# Altium PCB PCB1.PcbDoc
Units mil, origin at the board's own origin, x right, y up, seen from the top; angles counter-clockwise.
Board outline 10755 x 3040 mil, 2 copper layers (Top Layer, Bottom Layer); 15 components, 36 nets, 97 pads, 4 vias.
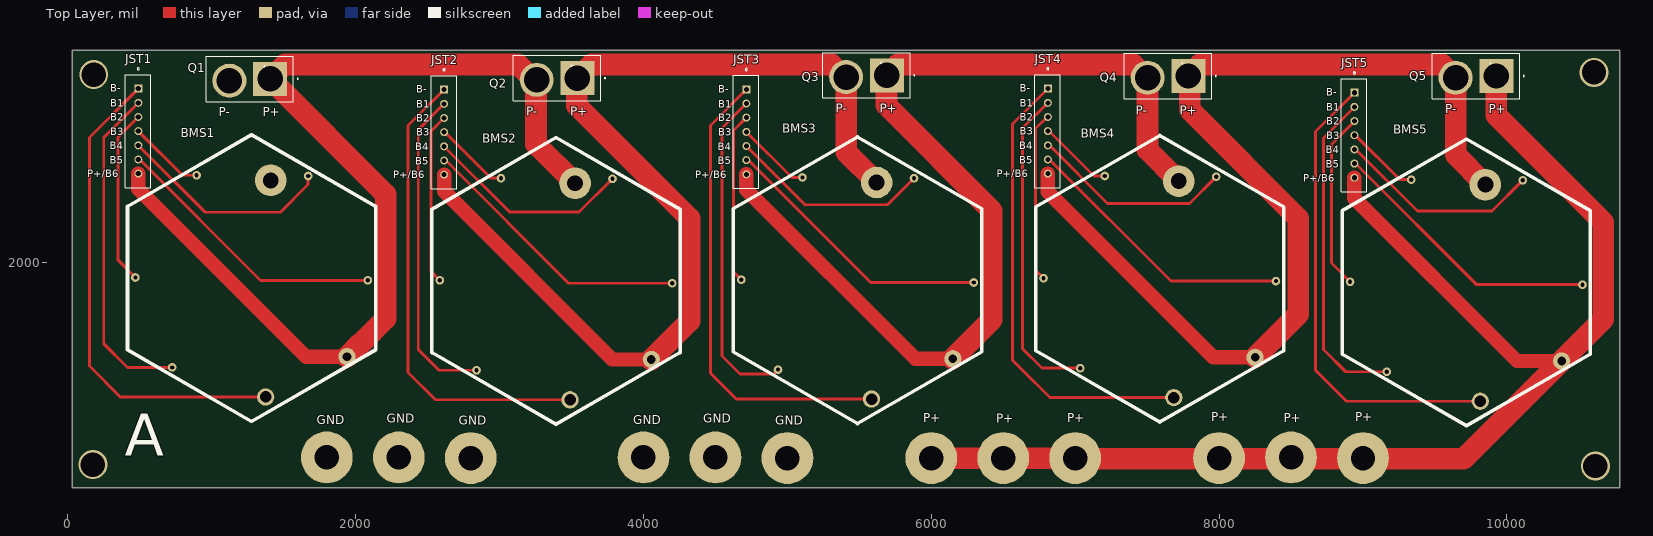
[diagram p0: Top Layer view]
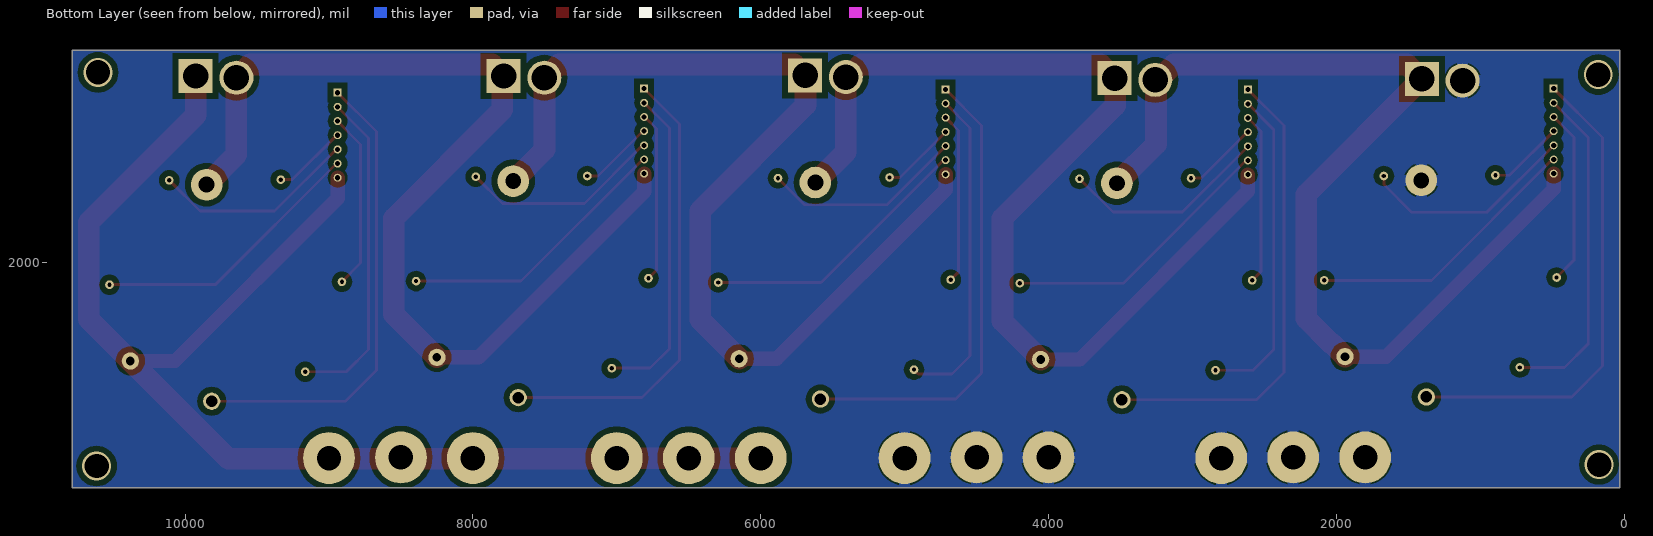
[diagram p1: Bottom Layer view, seen from below]

## Layer stack, top to bottom
Top Solder: solder mask 0.4, Solder Resist, Dk 3.5
Top Layer: signal copper 1.4
Dielectric 1: dielectric 12.6, FR-4, Dk 4.8
Bottom Layer: signal copper 1.4
Bottom Solder: solder mask 0.4, Solder Resist, Dk 3.5

## Board outline
30,435 30,3475 10785,3475 10785,435

## Design rules (kind name [scope] priority, off if disabled: settings)
Clearance Clearance_2 [InNamedPolygon('Bottom Layer-GND')] p1: gap=40 ignorepadtopadclearanceinfootprint=FALSE
Clearance [All] p2: gap=10 ignorepadtopadclearanceinfootprint=FALSE except(0: Arc-Hole Track-Hole SMDPad-Hole THPad-Hole Via-Hole Fill-Hole Poly-Hole Region-Hole Text-Hole)
PlaneClearance [All] p1: clearance=100
PolygonConnect PolygonConnect_1 [All vs IsNamedPolygon('Bottom Layer-GND')] p1: connectstyle=Relief reliefconductorwidth=80 reliefentries=4 polygonreliefangle="90 Angle" airgapwidth=10
PolygonConnect [All] p2: connectstyle=Relief reliefconductorwidth=10 reliefentries=4 polygonreliefangle="90 Angle" airgapwidth=10
RoutingVias [All] p1: holewidth=28 width=50 viastyle="Through Hole" minholewidth=28 minwidth=50 maxholewidth=28 maxwidth=50
SolderMaskExpansion [All] p1: expansion=4
Width [All] p1: maxlimit=150 minlimit=6 preferedwidth=10
29 further rules are at their usual default settings.

## Components (designator, comment, footprint, x,y, rotation, side; value= is the part's Value field where it differs from the comment)
BMS1 "BMS" BMS 2140,895 r90 top
BMS2 "BMS" BMS 4255,875 r90 top
BMS3 "BMS" BMS 6350,880 r90 top
BMS4 "BMS" BMS 8450,890 r90 top
BMS5 "BMS" BMS 10580,865 r90 top
JST1 "JST" JST 626.22,2911.57 r270 top
JST2 "JST" JST 2751.22,2904.72 r270 top
JST3 "JST" JST 4851.22,2906.85 r270 top
JST4 "JST" JST 6946.22,2911.85 r270 top
JST5 "JST" JST 9076.22,2883.43 r270 top
Q1 "XT60_YELLOW" *AMASS_XT60PB-M 1265,3275 r180 top
Q2 "XT60_YELLOW" *AMASS_XT60PB-M 3400,3280 r180 top
Q3 "XT60_YELLOW" *AMASS_XT60PB-M 5550,3300 r180 top
Q4 "XT60_YELLOW" *AMASS_XT60PB-M 7645,3295 r180 top
Q5 "XT60_YELLOW" *AMASS_XT60PB-M 9785,3295 r180 top

## Footprints (in the part's own frame and the unit in brackets; to place one, negate y for a bottom-side part, rotate by r counter-clockwise, add the part's x,y. Pads: shape width x height; smd on the part's side, far side on the other; paste and mask are expansions set on the pad)
*AMASS_XT60PB-M [mm]
  rect 6x6 hole 4.5: 1(-3.6,0)
  round 6 hole 4.5: 2(3.6,0.305)
  silkscreen extent -8.55,-4 7.7,4
BMS [mil]
  round 120 hole 80: 0(170,765)
  round 60 hole 30: 1(375,1415) 2(1000,1670) 3(1710,1245) 5(1705,470) 6(980,55)
  round 220 hole 110: 4(1675,730)
  round 120 hole 60: 7(450,200)
  silkscreen extent 0,0 1992,1725
JST [mm]
  rect 1.408x1.408 hole 0.9: 1(-7.5,-3.46)
  round 1.408 hole 0.9: 2(-5,-3.46) 3(-2.5,-3.46) 4(0,-3.46) 5(2.5,-3.46) 6(5,-3.46) 7(7.5,-3.46)
  silkscreen extent -11.2,-5.75 9.95,-1.25

## Part data
BMS1 BMS2 BMS3 BMS4 BMS5: "Battery Management System"
JST1 JST2 JST3 JST4 JST5: "Connector Header Through Hole, Right Angle 7 position 0.098 _2.50mm_", Package=None, Availability=Unavailable, MF="JST Sales", MP=S7B-XH-A_LF__SN_, Price=None, SnapEDA_Link=https://www.snapeda.com/parts/S7B-XH-A%28LF%29%28SN%29/JST%20Sales%20America%20Inc./view-part/2768211/?ref=snap
Q1 Q2 Q3 Q4 Q5: library part EC3, "Power connector; 65A; PIN: 2; Colour: yellow", Package=None, Availability=Unavailable, MF=Pololu, MP="XT60 YELLOW", Price=None, SnapEDA_Link=https://www.snapeda.com/parts/XT60%20YELLOW/Pololu/view-part/423230/?ref=snap

## Free pads (board coordinates)
  round 360 hole 170: 2(1800,645) 2(2300,645) 2(2800,640) 2(4000,645) 2(4500,645) 2(5000,640) 2(6000,640) 2(6500,640) 2(7000,640) 2(8000,640) 2(8500,645) 2(9000,640)

## Via types
v1: diameter 200, hole 170, Top Layer to Bottom Layer, 4 vias

## Nets (pads, with @x,y where several pads share a name; then routed paths per layer and width w, separated by ;. In a path a pad name is that pad's centre, name@x,y a point inside that pad or via, vN(x,y) a via of type N, cw(c..) or ccw(c..) an arc to the next point about the centre after c; other vN are vias at no path point)
GND: BMS1.4 pad.2@1800,645 pad.2@2300,645 pad.2@2800,640 pad.2@4000,645 pad.2@4500,645 pad.2@5000,640 Q1.2 | length 32.5
  Top Layer w90: Q1.2@1115.28,3225 Q1.2@1138.27,3247.99
NetBMS1_0: BMS1.0 JST1.1 | length 3381.7
  Top Layer w20: JST1.1 150,2866.85 150,1280 365,1065 BMS1.0
NetBMS1_1: BMS1.1 JST1.2 | length 2316.2
  Top Layer w20: JST1.2 250,2868.43 250,1435 415,1270 BMS1.1
NetBMS1_2: BMS1.2 JST1.3 | length 1222.6
  Top Layer w20: BMS1.2 350.11,2014.89 350.11,2870.11 JST1.3
NetBMS1_3: BMS1.3 JST1.4 | length 532
  Top Layer w20: JST1.4 796.57,2605 BMS1.3
NetBMS1_5: BMS1.5 JST1.5 | length 1512.3
  Top Layer w20: JST1.5 955.26,2347.89 1477.89,2347.89 1670,2540 BMS1.5
NetBMS1_6: BMS1.6 JST1.6 | length 1942.8
  Top Layer w20: JST1.6 500.28,2714.72 1340,1875 BMS1.6
NetBMS1_7: BMS1.7 BMS2.4 JST1.7 Q1.1 Q2.2 | length 7171.2
  Top Layer w100: JST1.7 490,2510 1655,1345 BMS1.7
  Top Layer w150: BMS1.7 2030,1435 2035,1435 2210,1610 2210,2471.73 Q1.1 1506.73,3375 3130,3375 3237.01,3267.99 Q2.2 ; Q2.2@3253.27,3255 3253.27,2821.73 BMS2.4
NetBMS2_0: BMS2.0 JST2.1 | length 3272.3
  Top Layer w20: JST2.1 2365,2950 2365,1235 2555,1045 BMS2.0
NetBMS2_1: BMS2.1 JST2.2 | length 2246.2
  Top Layer w20: JST2.2 2435,2921.57 2435,1395 2580,1250 BMS2.1
NetBMS2_2: BMS2.2 JST2.3 | length 1190.3
  Top Layer w20: BMS2.2 2525,1935 2525,2913.15 JST2.3
NetBMS2_3: BMS2.3 JST2.4 | length 527.4
  Top Layer w20: JST2.4 2620.28,2904.72 2940,2585 BMS2.3
NetBMS2_5: BMS2.5 JST2.5 | length 1455.9
  Top Layer w20: JST2.5 2615,2805 3071.04,2348.96 3552.45,2348.96 3783.5,2580 BMS2.5
NetBMS2_6: BMS2.6 JST2.6 | length 1938.3
  Top Layer w20: JST2.6 2627.13,2707.87 3480,1855 BMS2.6
NetBMS2_7: BMS2.7 BMS3.4 JST2.7 Q2.1 Q3.2 | length 7194
  Top Layer w100: JST2.7 2615,2493.19 3783.19,1325 BMS2.7
  Top Layer w150: BMS2.7 4320,1590 4320,2306.73 3536.73,3090 3536.73,3275 Q2.1 3636.73,3375 5306.58,3375 5395.32,3286.26 5410,3286.26 5410,2765 BMS3.4
NetBMS3_0: BMS3.0 JST3.1 | length 3270.2
  Top Layer w20: JST3.1 4465,2952.13 4465,1230 4645,1050 BMS3.0
NetBMS3_1: BMS3.1 JST3.2 | length 2278.3
  Top Layer w20: JST3.2 4545,2933.7 4545,1350 4670,1225 4905,1225 BMS3.1
NetBMS3_2: BMS3.2 JST3.3 | length 1187.8
  Top Layer w20: BMS3.2 4635,1925 4630.86,1925 4625,1930.86 4625,2915.28 JST3.3
NetBMS3_3: BMS3.3 JST3.4 | length 521.2
  Top Layer w20: JST3.4 5031.85,2590 BMS3.3
NetBMS3_5: BMS3.5 JST3.5 | length 1410.8
  Top Layer w20: JST3.5 5123.43,2400 5695,2400 BMS3.5
NetBMS3_6: BMS3.6 JST3.6 | length 1932.1
  Top Layer w20: JST3.6 4730,2710 5580,1860 BMS3.6
NetBMS3_7: BMS3.7 BMS4.4 JST3.7 Q3.1 Q4.2 | length 7115.4
  Top Layer w100: JST3.7 4715,2505 5890,1330 BMS3.7
  Top Layer w150: BMS3.7 6420,1600 6420,2359.4 5688.93,3090.47 5688.93,3297.2 Q3.1 5766.73,3375 7403.54,3375 7495.55,3282.99 Q4.2 7502.35,3282.08 7502.35,2782.65 BMS4.4 7717.29,2565 7712.29,2570 BMS4.4@7710,2570
NetBMS4_0: BMS4.0 JST4.1 | length 3216.3
  Top Layer w20: JST4.1 6565,2962.13 6565,1320 6635,1250 6825,1060 BMS4.0
NetBMS4_1: BMS4.1 JST4.2 | length 2237.1
  Top Layer w20: JST4.2 6635,2933.7 6635,1400 6770,1265 BMS4.1
NetBMS4_2: BMS4.2 JST4.3 | length 1180.5
  Top Layer w20: BMS4.2 6725,1945 6725,2929.14 6806.13,3010.28 JST4.3
NetBMS4_3: BMS4.3 JST4.4 | length 524.2
  Top Layer w20: JST4.4 6818.15,2911.85 7130,2600 BMS4.3
NetBMS4_5: BMS4.5 JST4.5 | length 1413.7
  Top Layer w20: JST4.5 6821.57,2813.43 7225,2410 7795,2410 BMS4.5
NetBMS4_6: BMS4.6 JST4.6 | length 1935
  Top Layer w20: JST4.6 6820,2715 7665,1870 BMS4.6
NetBMS4_7: BMS4.7 BMS5.4 JST4.7 Q4.1 Q5.2 | length 7199.6
  Top Layer w100: JST4.7 6810,2490 7960,1340 BMS4.7
  Top Layer w150: Q4.1 Q4.1@7795,3303.27 ; BMS4.7 8550,1640 8550,2305 7795,3060 Q4.1@7795,3303.27 ; BMS5.4 9643.27,2746.73 Q5.2 9551.26,3375 7866.73,3375 7854.84,3363.11 Q4.1@7795,3303.27
NetBMS5_0: BMS5.0 JST5.1 | length 3274.6
  Top Layer w20: JST5.1 8670,2908.7 8670,1250 8885,1035 BMS5.0
NetBMS5_1: BMS5.1 JST5.2 | length 2278.5
  Top Layer w20: JST5.2 8725,2865.28 8725,1395 8880,1240 BMS5.1
NetBMS5_2: BMS5.2 JST5.3 | length 1237
  Top Layer w20: BMS5.2 8780,1995 8780,2820 8940,2980 JST5.3
NetBMS5_3: BMS5.3 JST5.4 | length 522.8
  Top Layer w20: JST5.4 8946.57,2883.43 9255,2575 BMS5.3
NetBMS5_5: BMS5.5 JST5.5 | length 1435.7
  Top Layer w20: JST5.5 8950,2785 9378.25,2356.75 9896.42,2356.75 10109.67,2570 BMS5.5
NetBMS5_6: BMS5.6 JST5.6 | length 1933.6
  Top Layer w20: JST5.6 8948.43,2686.57 9790,1845 BMS5.6
NetBMS5_7: BMS5.7 JST5.7 pad.2@6000,640 pad.2@6500,640 pad.2@7000,640 pad.2@8000,640 pad.2@8500,645 pad.2@9000,640 Q5.1 | length 9256
  Top Layer w100: JST5.7 8940,2445 10070,1315 BMS5.7@10379.84,1315
  Top Layer w150: pad.2@6000,640 6500,640 pad.2@7000,640 ; pad.2@6937.77,637.77 7000.02,639.2 7035,640 7000.11,638.06 7000.11,635 8000,635 9699.84,635 10379.84,1315 BMS5.7 10380,1315.16 10670,1605.16 10670,2280 9926.57,3023.43 9926.57,3294.84 Q5.1
copper on no net:
  other v1: 10615,585 175,595 180,3305 10605,3320

## Polygon pours and split planes (outlines as drawn)
no net on Top Layer "NONET_L01_P003" (solid, pour order 3): 6020,1670
no net on Top Layer "NONET_L01_P000" (solid, pour order 0): 15,65
GND on Bottom Layer "Bottom Layer-GND" (solid, pour order 5): 30,3475 30,435 10785,435 10785,3475
no net on Bottom Layer "NONET_L02_P002" (solid, pour order 2): 5810,3075

## Other copper
Top Layer:

## Silkscreen, mask and mechanical layers (free items; w line width, h text height)
Top Overlay:
  text "B-" at 295,3185 h50
  text "B-" at 6615,3185.28 h50
  text "B-" at 4520,3180.28 h50
  text "B-" at 2420,3178.15 h50
  text "B-" at 8745,3156.85 h50
  text "B1" at 295,3080 h50
  text "B1" at 6615,3080.28 h50
  text "B1" at 4520,3075.28 h50
  text "B1" at 2420,3073.15 h50
  text "B1" at 8745,3051.85 h50
  text "P-" at 5336.73,3038.27 h60
  text "P+" at 5641.73,3038.27 h60
  text "P-" at 9570,3035 h60
  text "P+" at 9875,3035 h60
  text "P-" at 7421.73,3027.01 h60
  text "P+" at 7726.73,3027.01 h60
  text "P-" at 3185,3020 h60
  text "P+" at 3490,3020 h60
  text "P-" at 1050,3015 h60
  text "P+" at 1355,3015 h60
  text "B2" at 295,2985 h50
  text "B2" at 6615,2985.28 h50
  text "B2" at 4520,2980.28 h50
  text "B2" at 2420,2978.15 h50
  text "B2" at 8745,2956.85 h50
  text "B3" at 295,2885 h50
  text "B3" at 6615,2885.28 h50
  text "B3" at 4520,2880.28 h50
  text "B3" at 2420,2878.15 h50
  text "B3" at 8745,2856.85 h50
  text "B4" at 290,2785 h50
  text "B4" at 6610,2785.28 h50
  text "B4" at 4515,2780.28 h50
  text "B4" at 2415,2778.15 h50
  text "B4" at 8740,2756.85 h50
  text "B5" at 290,2685 h50
  text "B5" at 6610,2685.28 h50
  text "B5" at 4515,2680.28 h50
  text "B5" at 2415,2678.15 h50
  text "B5" at 8740,2656.85 h50
  text "P+/B6" at 135,2590 h50
  text "P+/B6" at 6455,2590.28 h50
  text "P+/B6" at 4360,2585.28 h50
  text "P+/B6" at 2260,2583.15 h50
  text "P+/B6" at 8585,2561.85 h50
  text "P+" at 7945,895 h60
  text "P+" at 8945,895 h60
  text "P+" at 5945,890 h60
  text "P+" at 6945,890 h60
  text "P+" at 8450,890 h60
  text "GND" at 2215,885 h60
  text "GND" at 4415,885 h60
  text "P+" at 6450,885 h60
  text "GND" at 1730,875 h60
  text "GND" at 3930,875 h60
  text "GND" at 2715,870 h60
  text "GND" at 4915,870 h60
  text "A" at 395,560 h500
Mechanical 1:
  the board outline again, w10